# Altium PCB CNC_Remote.PcbDoc
Units mm, origin at the board's own origin, x right, y up, seen from the top; angles counter-clockwise.
Board outline 92.79 x 63.63 mm, 2 copper layers (Top, Bottom), stack 1.57 mm thick; 35 components, 19 nets, 136 pads, 14 vias.
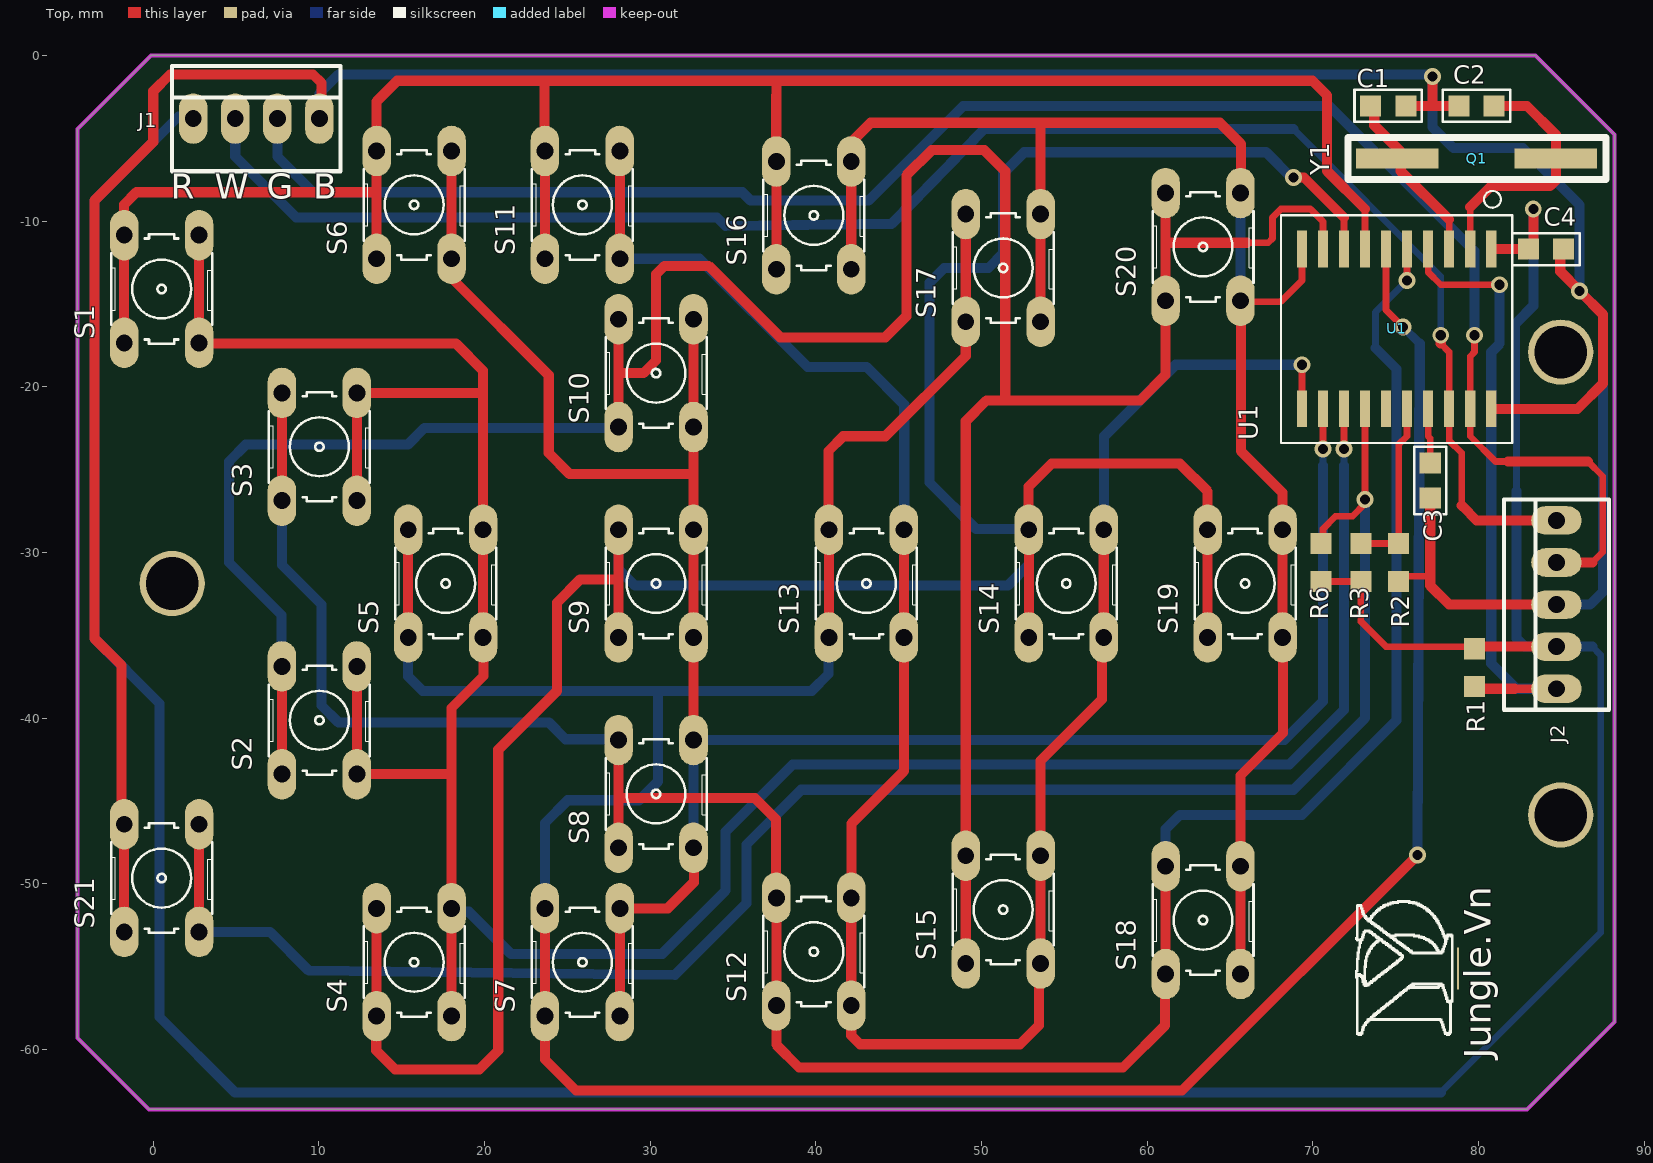
[diagram p0: Top view]
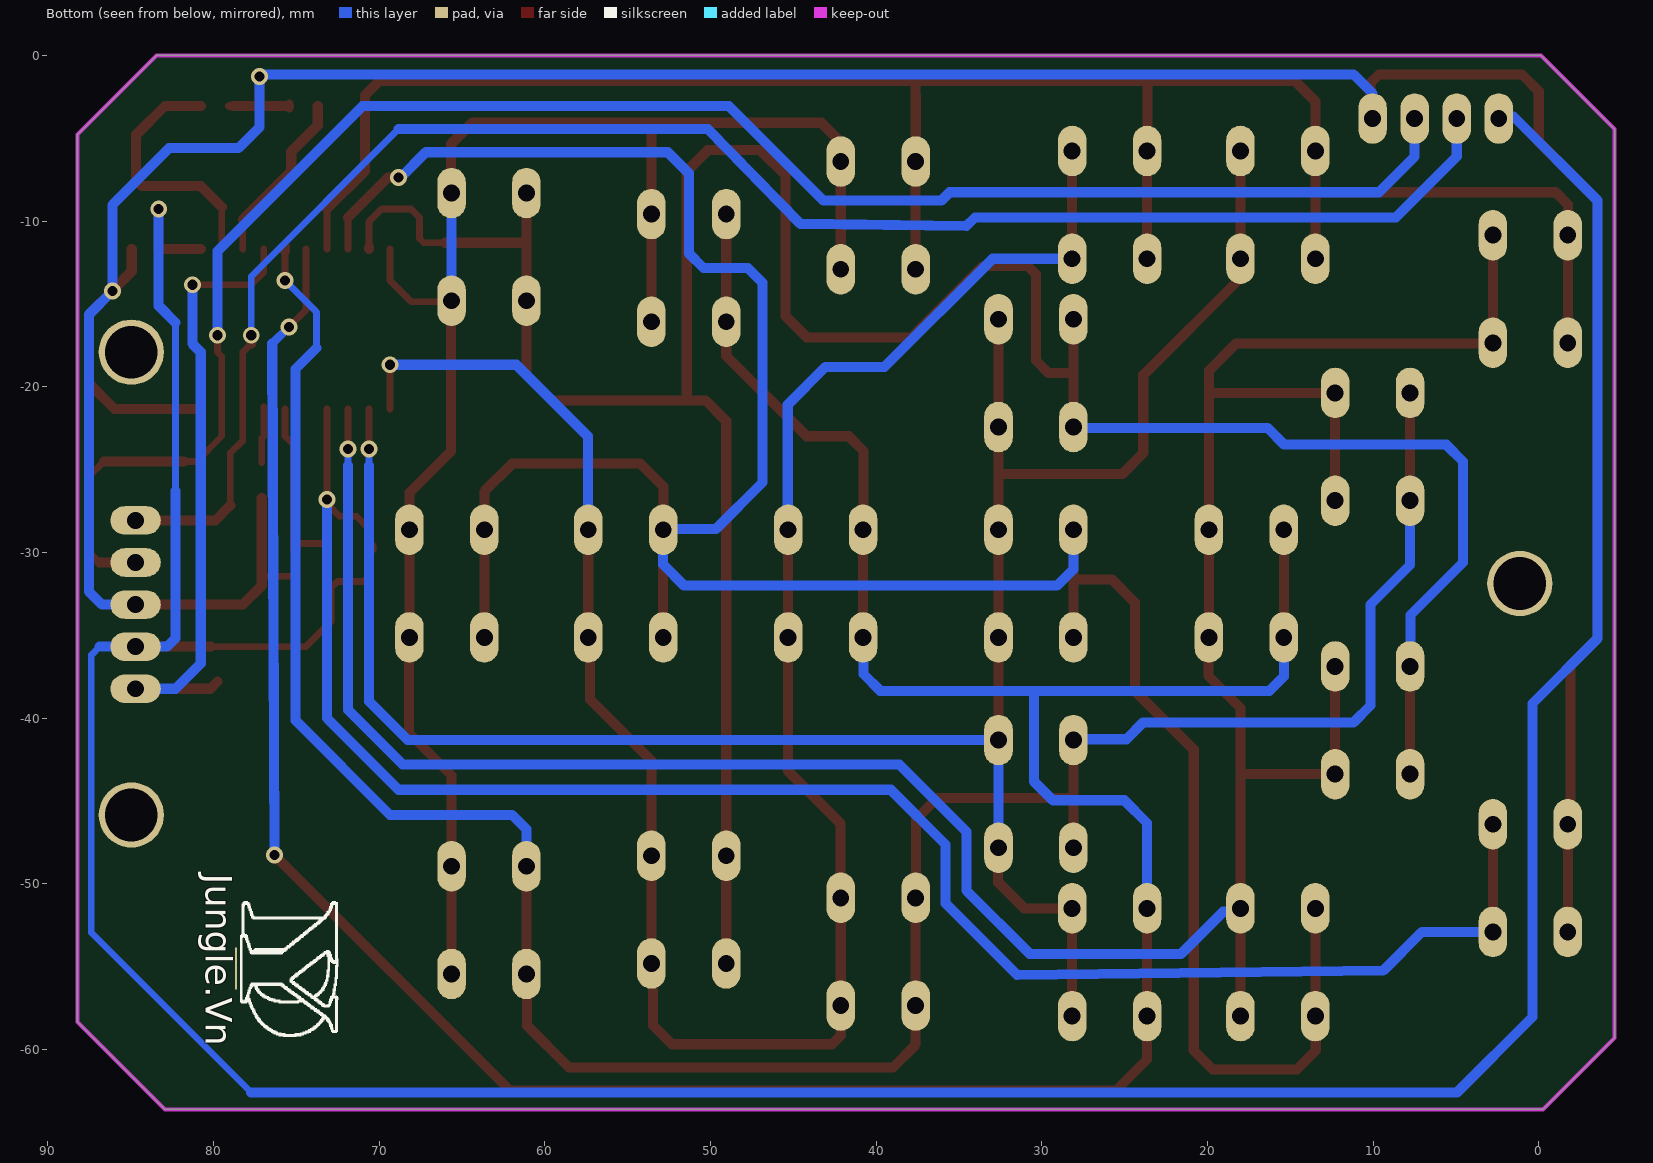
[diagram p1: Bottom view, seen from below]

## Layer stack, top to bottom
Top Solder: solder mask 0.0102, Solder Resist, Dk 3.5
Top: signal copper 0.035
Dielectric 1: core 1.5, FR-4, Dk 4.8
Bottom: signal copper 0.035
Bottom Solder: solder mask 0.0102, Solder Resist, Dk 3.5

## Board outline
-0.254,-63.627 -4.572,-59.309 -4.572,-4.445 -0.127,0 83.439,0 88.214,-4.775 88.214,-58.344 82.931,-63.627

## Design rules (kind name [scope] priority, off if disabled: settings)
Clearance mdViaVia [IsVia vs IsVia] p1: gap=0.254
Clearance mdPadVia [IsPad vs IsVia] p2: gap=0.254
Clearance mdPadPad [IsPad vs IsPad] p3: gap=0.254
Clearance mdWireVia [(InLayerClass('Signal Layers') AND IsTrack) vs IsVia] p4: gap=0.254
Clearance mdWirePad [(InLayerClass('Signal Layers') AND IsTrack) vs IsPad] p5: gap=0.254
Clearance mdWireWire [(InLayerClass('Signal Layers') AND IsTrack) vs (InLayerClass('Signal Layers') AND IsTrack)] p6: gap=0.254
Clearance [All] p7: gap=0.254
HoleSize [All] p1: absolutevalues=TRUE maxlimit=2540 minlimit=0.508 maxpercent=80.000 minpercent=20.000
HoleToHoleClearance [All] p1: gap=0.203 allowstackedmicrovias=TRUE
PolygonConnect [All] p1: connectstyle=Relief reliefconductorwidth=0.254 reliefentries=4 polygonreliefangle="90 Angle" airgapwidth=0.254
RoutingVias [All] p1: holewidth=0.711 width=1.27 viastyle="Through Hole" minholewidth=0.711 minwidth=1.27 maxholewidth=0.711 maxwidth=1.27
SilkToSilkClearance [All] p1 off: silktosilkclearance=0.254
SilkToSolderMaskClearance [IsPad] p1 off: minsilkscreentomaskgap=0.254 clearancetoexposedcopper=TRUE
SolderMaskExpansion [All] p1: expansion=0.102
Width [All] p1: maxlimit=2540 minlimit=0.305 preferedwidth=0.254
25 further rules are at their usual default settings.

## Classes and differential pairs
component class CNC_Remote: C1 C2 C3 C4 J1 J2 Q1 R1 R2 R3 R6 S1 S2 S3 S4 S5 S6 S7 S8 S9 S10 S11 S12 S13 S14 S15 S16 S17 S18 S19 S20 S21 U1

## Components (designator, comment, footprint, x,y, rotation, side; value= is the part's Value field where it differs from the comment)
C1 "20pF" C0805 74.549,-3.048 r0 top
C2 "20pF" C0805 79.883,-3.048 r180 top
C3 "0.47uF" C0805 77.089,-25.654 r270 top
C4 "0.1uF" C0805 84.074,-11.684 r0 top
DY_LOGO "DY_LOGO" DY_logo 76.962,-54.991 r270 bottom
DY_LOGO1 "DY_LOGO" DY_logo 77.089,-55.245 r90 top
J1 "USB" 22-23-2041 6.223,-3.81 r0 top
J2 "22-23-2051" 22-23-2051 84.709,-33.147 r90 top
Q1 "12.0Mhz" HC49/US 79.883,-6.223 r0 top
R1 "10K" R0805 79.756,-36.957 r90 top
R2 "0" R0805 75.184,-30.607 r90 top
R3 "0" R0805 72.898,-30.607 r270 top
R6 "10k" R0805 70.485,-30.607 r270 top
S1 "10-XX" B3F-10XX 0.508,-14.097 r90 top
S2 "10-XX" B3F-10XX 10.033,-40.132 r90 top
S3 "10-XX" B3F-10XX 10.033,-23.622 r90 top
S4 "10-XX" B3F-10XX 15.748,-54.737 r90 top
S5 "10-XX" B3F-10XX 17.653,-31.877 r90 top
S6 "10-XX" B3F-10XX 15.748,-9.017 r90 top
S7 "10-XX" B3F-10XX 25.908,-54.737 r90 top
S8 "10-XX" B3F-10XX 30.353,-44.577 r90 top
S9 "10-XX" B3F-10XX 30.353,-31.877 r90 top
S10 "10-XX" B3F-10XX 30.353,-19.177 r90 top
S11 "10-XX" B3F-10XX 25.908,-9.017 r90 top
S12 "10-XX" B3F-10XX 39.878,-54.102 r90 top
S13 "10-XX" B3F-10XX 43.053,-31.877 r90 top
S14 "10-XX" B3F-10XX 55.118,-31.877 r90 top
S15 "10-XX" B3F-10XX 51.308,-51.562 r90 top
S16 "10-XX" B3F-10XX 39.878,-9.652 r90 top
S17 "10-XX" B3F-10XX 51.308,-12.827 r90 top
S18 "10-XX" B3F-10XX 63.373,-52.197 r90 top
S19 "10-XX" B3F-10XX 65.913,-31.877 r90 top
S20 "10-XX" B3F-10XX 63.373,-11.557 r90 top
S21 "10-XX" B3F-10XX 0.508,-49.657 r90 top
U1 "PIC18F1*K50SOIC" SOIC-20 69.342,-11.684 r180 top

## Footprints (in the part's own frame and the unit in brackets; to place one, negate y for a bottom-side part, rotate by r counter-clockwise, add the part's x,y. Pads: shape width x height; smd on the part's side, far side on the other; paste and mask are expansions set on the pad)
22-23-2041 [mil] "22-23-2041"
  oval 67.87x120 hole 40: 1(-150,0) 2(-50,0) 3(50,0) 4(150,0)
  silkscreen extent -200,-125 200,125
22-23-2051 [mil] "22-23-2051"
  oval 67.87x120 hole 40: 1(-200,0) 2(-100,0) 3(0,0) 4(100,0) 5(200,0)
  silkscreen extent -250,-125 250,125
B3F-10XX [mil] "B3F-10XX"
  oval 120x67.87 hole 40: 1(-128,89) 2(128,89) 3(-128,-89) 4(128,-89)
  silkscreen extent -130,-120 130,120
C0805 [mil] "2.0x1.2 mm"
  rect 50x50 smd mask+8: 1(-42,0) 2(42,0)
  silkscreen extent -80,-38 80,38, body extent -39,-25 39,25, height 39
DY_logo [mm]
  rect 2.54x0.127 smd: 1(0.125,-1.675)
  silkscreen extent -3.93,-1.39 4.25,4.5
HC49/US [mm] "HC49/US"
  rect 5x1.219 smd: P$1(4.788,0) P$2(-4.787,0)
  silkscreen extent -7.76,-1.27 7.81,1.27
R0805 [mil] "2.0x1.2 mm"
  rect 50x50 smd mask+8: 1(-45,0) 2(45,0)
  body extent -39,-25 39,25, height 18
SOIC-20 [mil] "SOIC-20"
  rect 24x87 smd: P$1(-450,0) P$2(-400,0) P$3(-350,0) P$4(-300,0) P$5(-250,0) P$6(-200,0) P$7(-150,0) P$8(-100,0) P$9(-50,0) P$10(0,0) P$11(0,380) P$12(-50,380) P$13(-100,380) P$14(-150,380) P$15(-200,380) P$16(-250,380) P$17(-300,380) P$18(-350,380) P$19(-400,380) P$20(-450,380)
  silkscreen extent -500,-138 50,461

## Part data
C1 C2 C3 C4: library part C-EUC0603, "<B>CAPACITOR</B>, European symbol"
J1: library part 22-23-2041, ".100\" (2.54mm) Center Header - 4 Pin"
J2: ".100\" (2.54mm) Center Header - 5 Pin"
Q1: library part CSM-3X
R1 R2 R3 R6: library part R-US_R0603, "<B>RESISTOR</B>, American symbol"
S1 S2 S3 S4 S5 S6 S7 S8 S9 S10 S11 S12 S13 S14 S15 S16 S17 S18 S19 S20 S21: "<b>OMRON SWITCH</b>"

## Free pads (board coordinates)
  round 3.937 hole 3.175: 1(1.143,-31.877) 1(84.963,-45.847) 1(84.963,-17.907)

## Via types
v1: diameter 1.016/1.016 (per signal layer), hole 0.61, Top to Bottom, 14 vias

## Nets (pads, with @x,y where several pads share a name; then routed paths per layer and width w, separated by ;. In a path a pad name is that pad's centre, name@x,y a point inside that pad or via, vN(x,y) a via of type N, cw(c..) or ccw(c..) an arc to the next point about the centre after c; other vN are vias at no path point)
+5V: C4.1 J1.1 J2.2 R1.2 R3.2 R6.2 U1.P$1 | length 222.8
  Top w0.406: R6.2@70.612,-31.445 70.917,-31.75 72.517,-31.75 72.898,-32.131 72.898,-34.163 74.422,-35.687 R1.2@80.162,-35.687
  Top w0.508: C4.1@83.236,-11.684 C4.1@83.312,-11.557
  Top w0.61: R1.2@80.162,-35.687 J2.2 ; U1.P$1 83.236,-11.684 C4.1@83.312,-11.684 ; C4.1@83.312,-11.811 C4.1@83.312,-11.684 ; v1(83.312,-9.271) 83.312,-11.557 C4.1@83.312,-11.684
  Bottom w0.406: 77.724,-62.611 87.376,-52.959 87.376,-36.195 86.868,-35.687 ; 82.296,-26.289 82.296,-16.129
  Bottom w0.61: J1.1 2.286,-3.683 1.524,-3.683 -3.556,-8.763 -3.556,-35.179 0.381,-39.116 0.381,-58.039 4.953,-62.611 77.724,-62.611 ; 82.296,-26.289 82.296,-35.179 82.804,-35.687 J2.2 86.868,-35.687 ; 82.296,-16.129 83.312,-15.113 v1(83.312,-9.271)
COL_0: S1.1 S1.2 S6.1 S6.2 S11.1 S11.2 S16.1 S16.2 U1.P$7 | length 128.2
  Top w0.406: U1.P$7 73.152,-9.271
  Top w0.508: S16.2@37.592,-6.477 S16.2
  Top w0.61: S1.1 S1.2 -1.753,-8.992 -1.016,-8.255 13.487,-8.255 ; S6.2@13.437,-5.715 S6.2 ; S6.1 13.487,-8.255 ; S11.1 S11.2 23.622,-5.74 23.622,-1.651 23.495,-1.524 ; 37.592,-2.413 37.592,-6.477 37.617,-6.502 S16.1 ; S16.2 37.617,-1.549 37.592,-1.524 ; 73.152,-9.271 70.866,-6.985 70.866,-2.413 69.977,-1.524 37.592,-1.524 ; 13.487,-8.255 S6.2 ; S6.2 13.487,-2.769 14.732,-1.524 23.495,-1.524 ; 23.495,-1.524 37.592,-1.524
COL_1: S5.1 S5.2 S7.1 S7.2 S13.1 S13.2 S17.1 S17.2 U1.P$6 | length 192.3
  Top w0.406: U1.P$6 74.422,-15.367 v1(75.438,-16.383)
  Top w0.61: S5.1 S5.2 ; S7.2 S7.1 23.647,-60.604 25.527,-62.484 35.179,-62.484 62.103,-62.484 v1(76.327,-48.26) ; S13.1 S13.2 40.767,-28.6 40.767,-23.876 41.656,-22.987 44.196,-22.987 49.047,-18.136 S17.1 S17.2
  Bottom w0.305: S13.1@40.767,-35.179 40.894,-35.179 S13.1
  Bottom w0.508: v1(75.438,-16.383) 76.454,-17.399
  Bottom w0.61: S5.1 15.392,-37.49 16.256,-38.354 30.48,-38.354 ; S7.2 23.647,-46.33 25.019,-44.958 29.337,-44.958 30.48,-43.815 30.48,-38.354 ; S13.1@40.767,-35.179 40.767,-37.338 39.751,-38.354 30.48,-38.354 ; v1(76.327,-48.26) 76.454,-17.399
COL_2: S3.1 S3.2 S8.1 S8.2 S12.1 S12.2 S18.1 S18.2 U1.P$5 | length 152.7
  Top w0.305: S18.2 61.214,-48.895 S18.2@61.112,-48.895
  Top w0.406: v1(75.692,-13.589) U1.P$5@75.692,-11.811
  Top w0.61: S3.1 S3.2 ; S8.1 28.092,-44.831 ; S8.2 28.092,-44.831 ; S18.2@61.087,-48.768 61.112,-48.793 61.112,-48.895 S18.2 S18.1 61.087,-55.474 61.087,-58.547 58.547,-61.087 38.989,-61.087 37.617,-59.715 S12.1 S12.2 37.592,-50.825 37.592,-46.101 36.322,-44.831 28.092,-44.831 ; U1.P$5@75.692,-11.811 U1.P$5 U1.P$5@75.692,-11.557
  Bottom w0.406: 73.787,-17.653 73.787,-15.494 v1(75.692,-13.589)
  Bottom w0.61: S3.1 7.772,-30.759 10.16,-33.147 10.16,-39.243 11.176,-40.259 23.876,-40.259 24.892,-41.275 28.042,-41.275 S8.2 ; S18.2 61.112,-46.711 61.976,-45.847 69.342,-45.847 75.057,-40.132 75.057,-18.923 73.787,-17.653
COL_3: S4.1 S4.2 S9.1 S9.2 S14.1 S14.2 S19.1 S19.2 U1.P$8 | length 171
  Top w0.406: U1.P$8 71.882,-9.779
  Top w0.508: S4.1@13.462,-58.039 13.716,-58.039 S4.1
  Top w0.61: S4.1@13.462,-57.912 S4.1@13.462,-58.039 ; S4.2 S4.1 13.487,-58.014 S4.1@13.462,-58.039 ; S9.1 28.092,-31.775 27.94,-31.623 ; S9.2 28.092,-31.623 27.94,-31.623 ; S14.1 S14.2 52.832,-28.6 52.832,-26.035 54.229,-24.638 61.976,-24.638 63.652,-26.314 S19.2 S19.1 ; v1(68.834,-7.366) 69.469,-7.366 71.882,-9.779 ; S4.1@13.462,-58.039 13.462,-60.071 14.605,-61.214 19.685,-61.214 20.828,-60.071 20.828,-41.91 24.384,-38.354 24.384,-33.02 25.781,-31.623 27.94,-31.623
  Bottom w0.61: S9.2 28.092,-31.013 29.083,-32.004 51.587,-32.004 52.857,-30.734 S14.2 52.807,-28.575 49.657,-28.575 46.863,-25.781 46.863,-13.716 47.752,-12.827 50.419,-12.827 51.308,-11.938 51.308,-7.112 52.578,-5.842 67.183,-5.842 68.707,-7.366 v1(68.834,-7.366)
COL_4: S2.1 S2.2 S10.1 S10.2 S15.1 S15.2 S20.1 S20.2 U1.P$9 | length 176.1
  Top w0.406: 66.04,-11.303 67.31,-11.303 67.564,-11.049 67.564,-9.779 68.072,-9.271 69.85,-9.271 70.612,-10.033 U1.P$9@70.612,-11.557
  Top w0.61: S2.1 S2.2 ; S10.1 28.092,-19.304 ; S10.2 28.092,-19.304 ; S15.1 S15.2 49.047,-22.073 50.292,-20.828 51.308,-20.828 ; S20.2 61.112,-11.303 ; 66.04,-11.303 61.112,-11.303 ; U1.P$9 U1.P$9@70.612,-11.557 ; 28.092,-19.304 28.219,-19.177 29.591,-19.177 30.353,-18.415 30.353,-13.208 30.861,-12.7 33.528,-12.7 37.846,-17.018 44.196,-17.018 45.466,-15.748 45.466,-7.239 46.99,-5.715 50.165,-5.715 51.435,-6.985 51.435,-20.701 51.308,-20.828 ; 51.308,-20.828 59.563,-20.828 61.112,-19.279 S20.1 61.112,-11.303
  Bottom w0.61: S2.2 7.747,-36.855 7.747,-33.782 4.572,-30.607 4.572,-24.511 5.588,-23.495 15.367,-23.495 16.383,-22.479 28.042,-22.479 S10.1
D+/ICSPDAT: J1.3 J2.4 U1.P$19 | length 109.6
  Top w0.406: v1(79.756,-16.891) 79.756,-17.907 79.502,-18.161 U1.P$19 79.502,-22.987 81.026,-24.511 81.788,-24.511 ; 86.614,-24.511 87.503,-25.4 87.503,-29.972 86.868,-30.607
  Top w0.61: 81.788,-24.511 86.614,-24.511 ; J2.4 86.868,-30.607
  Bottom w0.61: J1.3 7.493,-6.096 9.652,-8.255 35.56,-8.255 36.068,-8.763 43.18,-8.763 48.895,-3.048 70.993,-3.048 79.756,-11.811 v1(79.756,-16.891)
D-/ICSPCLK: J1.2 J2.5 U1.P$18 | length 103.6
  Top w0.305: 78.994,-27.305 79.07,-27.229
  Top w0.406: 77.724,-17.399 78.232,-17.907 U1.P$18 78.232,-23.241 78.994,-24.003 78.994,-27.305
  Top w0.61: 77.724,-17.399 v1(77.724,-16.891) ; 78.994,-27.178 79.07,-27.229 79.883,-28.067 J2.5
  Bottom w0.406: 68.834,-4.445 77.724,-13.335 v1(77.724,-16.891)
  Bottom w0.61: J1.2 4.953,-6.096 8.636,-9.779 34.036,-9.779 34.544,-10.287 44.577,-10.16 50.165,-4.445 68.834,-4.445
GNDA: C1.2 C2.2 C3.2 C4.2 J1.4 J2.3 R2.1 S21.1 S21.2 U1.P$20 | length 214
  Top w0.406: R2.1@75.184,-31.445 76.937,-31.445 77.089,-31.623
  Top w0.508: C1.2@75.413,-3.048 75.438,-2.921 C1.2@75.438,-3.175 ; C2.2 C2.2@79.045,-3.048
  Top w0.61: S21.1 S21.2 -1.905,-46.253 -1.905,-36.83 -3.556,-35.179 -3.556,-8.763 0,-5.207 0,-2.159 1.016,-1.143 9.652,-1.143 10.16,-1.651 10.16,-3.683 J1.4 ; C1.2@75.438,-3.048 77.216,-3.048 ; C3.2 77.089,-31.623 77.089,-32.004 78.232,-33.147 J2.3 J2.3@84.836,-33.147 ; v1(77.216,-1.27) 77.216,-3.048 ; C2.2 77.216,-3.048 ; U1.P$20 85.979,-21.336 87.528,-19.787 87.528,-15.646 v1(86.106,-14.224) 84.938,-13.03 C4.2@84.938,-11.684
  Bottom w0.61: J1.4 10.033,-2.286 11.176,-1.143 77.089,-1.143 v1(77.216,-1.27) 77.216,-4.318 78.486,-5.588 82.677,-5.588 86.106,-9.017 v1(86.106,-14.224) 87.528,-15.646 87.528,-32.36 86.741,-33.147 J2.3
MCLR: J2.1 R1.1 U1.P$4 | length 38.8
  Top w0.406: U1.P$4 76.962,-13.081 77.724,-13.843 v1(81.28,-13.843)
  Top w0.508: 82.169,-38.227 J2.1
  Top w0.61: R1.1@79.756,-37.795 80.188,-38.227 82.169,-38.227
  Bottom w0.61: v1(81.28,-13.843) 81.28,-17.399 80.772,-17.907 80.772,-36.703 82.296,-38.227 J2.1
NetC3_1: C3.1 U1.P$17 | length 3.4
  Top w0.406: U1.P$17@76.962,-21.209 U1.P$17 76.962,-22.987 77.089,-23.114 C3.1
OSC1: C2.1 Q1.P$1 U1.P$2 | length 15.8
  Top w0.406: U1.P$2 79.502,-9.144
  Top w0.61: 79.502,-9.144 80.772,-7.874 84.328,-7.874 84.671,-7.531 Q1.P$1 84.671,-4.788 82.931,-3.048 C2.1 C2.1@80.747,-3.048
OSC2: C1.1 Q1.P$2 U1.P$3 | length 10.5
  Top w0.406: U1.P$3 78.232,-9.906
  Top w0.61: C1.1@73.711,-3.048 73.711,-4.216 75.311,-5.817 75.311,-6.985 78.232,-9.906
ROW_0: S1.3 S1.4 S2.3 S2.4 S3.3 S3.4 S4.3 S4.4 S5.3 S5.4 U1.P$13 | length 172.6
  Top w0.305: S5.3 20.066,-35.179 S5.3@19.939,-35.179
  Top w0.406: v1(71.882,-23.749) U1.P$13
  Top w0.61: S1.4 S1.3 2.819,-17.399 18.288,-17.399 19.914,-19.025 19.914,-20.447 ; S2.4 S2.3 17.831,-43.383 18.009,-43.561 ; S3.3 S3.4 19.837,-20.371 19.914,-20.447 ; S4.3 S4.4 18.009,-43.561 ; S5.3 S5.4 19.914,-20.447 ; S5.3@19.939,-35.154 19.939,-35.179 19.939,-37.465 18.009,-39.395 18.009,-43.561
  Bottom w0.305: S4.4 S4.4@18.034,-51.435
  Bottom w0.406: 71.882,-24.765 v1(71.882,-23.749)
  Bottom w0.61: S4.4@18.034,-51.435 18.034,-51.181 18.542,-51.689 19.05,-51.689 21.59,-54.229 30.734,-54.229 34.544,-50.419 34.544,-46.863 38.608,-42.799 68.58,-42.799 71.882,-39.497 71.882,-24.765
ROW_1: S6.3 S6.4 S7.3 S7.4 S8.3 S8.4 S9.3 S9.4 S10.3 S10.4 U1.P$12 | length 132.2
  Top w0.406: v1(70.612,-23.749) U1.P$12
  Top w0.61: S6.4 S6.3 18.009,-13.437 23.876,-19.304 23.876,-24.003 25.146,-25.273 32.487,-25.273 32.614,-25.4 ; S7.3 S7.4 31.064,-51.486 32.639,-49.911 32.639,-47.854 S8.3 ; S8.4 S9.3 S9.4 32.614,-25.4 ; S10.4 S10.3 32.614,-25.4
  Bottom w0.406: 70.612,-24.765 v1(70.612,-23.749)
  Bottom w0.61: S8.3 S8.4 68.275,-41.326 70.612,-38.989 70.612,-24.765
ROW_2: S11.3 S11.4 S12.3 S12.4 S13.3 S13.4 S14.3 S14.4 S15.3 S15.4 U1.P$11 | length 132.6
  Top w0.406: U1.P$11 v1(69.342,-18.669)
  Top w0.61: S11.3 S11.4 ; S13.4 S13.3 45.314,-43.205 42.164,-46.355 42.164,-50.825 S12.4 S12.3 42.139,-59.157 42.672,-59.69 52.324,-59.69 53.467,-58.547 53.467,-54.915 S15.3 S15.4 53.569,-42.57 57.277,-38.862 57.277,-35.23 S14.3 ; S14.4 S14.3 ; S14.3@57.404,-35.154 S14.3
  Bottom w0.305: S13.4 45.466,-28.575 S13.4@45.339,-28.575
  Bottom w0.508: S14.4 S14.4@57.404,-28.575
  Bottom w0.61: S11.3 32.969,-12.268 39.497,-18.796 43.053,-18.796 45.339,-21.082 45.339,-28.575 S13.4@45.339,-28.6 ; S14.4@57.404,-28.575 57.404,-22.987 61.722,-18.669 v1(69.342,-18.669)
ROW_3: S16.3 S16.4 S17.3 S17.4 S18.3 S18.4 S19.3 S19.4 S20.3 S20.4 U1.P$10 | length 102.8
  Top w0.406: S20.3@65.659,-14.732 65.634,-14.757 S20.3 65.684,-14.859 68.072,-14.859 69.342,-13.589 U1.P$10
  Top w0.61: S16.3 S16.4 42.139,-5.232 43.307,-4.064 53.467,-4.064 ; S17.3 S17.4 53.569,-4.166 53.467,-4.064 ; S18.3 S18.4 65.634,-43.459 68.199,-40.894 68.199,-35.154 S19.3 S19.4 68.174,-26.391 65.659,-23.876 S20.3@65.659,-14.732 ; S20.4 65.659,-8.28 65.659,-5.334 64.389,-4.064 53.467,-4.064
  Bottom w0.61: S20.3 S20.4
ROW_4: R6.1 S21.3 S21.4 U1.P$14 | length 110.2
  Top w0.305: R6.1@70.485,-29.743 70.612,-29.591 R6.1
  Top w0.406: R6.1@70.358,-29.845 70.358,-29.591 R6.1 70.612,-29.337 70.612,-28.575 71.374,-27.813 72.39,-27.813 73.152,-27.051 v1(73.152,-26.797) U1.P$14
  Top w0.61: S21.3 S21.4
  Bottom w0.61: S21.3 7.061,-52.908 9.398,-55.245 31.496,-55.499 35.814,-51.181 35.814,-47.625 39.116,-44.323 68.834,-44.323 73.152,-40.005 v1(73.152,-26.797)
SELECT: R2.2 R3.1 U1.P$16 | length 11.1
  Top w0.305: R2.2@75.184,-29.845 R2.2@75.184,-29.743
  Top w0.406: R3.1@73.152,-29.743 73.431,-29.464 R2.2 ; R2.2@74.93,-29.845 R2.2@75.184,-29.845 ; R2.2@75.184,-29.743 75.184,-23.495 75.692,-22.987 U1.P$16
pads on no net: DY_LOGO1.1 DY_LOGO.1 U1.P$15

## Keep-outs
Keep-Out Layer:
  lines w0.254: -4.572,-59.309 -0.254,-63.627 82.931,-63.627 88.214,-58.344 88.214,-4.775 83.439,0 80.797,0 -0.127,0 -4.572,-4.445 -4.572,-59.309

## Silkscreen, mask and mechanical layers (free items; w line width, h text height)
Top Overlay:
  text "Y1" at 71.374,-7.239 h1.97 r90
  text "R" at 1.073,-9.16 h2.6
  text "W" at 3.7,-9.16 h2.6
  text "G" at 6.842,-9.16 h2.6
  text "B" at 9.663,-9.16 h2.6
  text "U1" at 67.056,-23.241 h1.97 r90
  text "Jungle.Vn" at 81.28,-60.579 h2.76 r90
Bottom Overlay:
  text "Jungle.Vn" at 81.026,-49.403 h2.76 r90

## Text inside footprints (layer, text, board x,y; h text height)
S1: tDocu "1" at -1.143,-18.415 h1.97 r90; tDocu "2" at -1.016,-10.541 h1.97 r90; tDocu "3" at 3.302,-18.669 h1.97 r90; tDocu "4" at 3.302,-10.541 h1.97 r90
S2: tDocu "1" at 8.382,-44.45 h1.97 r90; tDocu "2" at 8.509,-36.576 h1.97 r90; tDocu "3" at 12.827,-44.704 h1.97 r90; tDocu "4" at 12.827,-36.576 h1.97 r90
S3: tDocu "1" at 8.382,-27.94 h1.97 r90; tDocu "2" at 8.509,-20.066 h1.97 r90; tDocu "3" at 12.827,-28.194 h1.97 r90; tDocu "4" at 12.827,-20.066 h1.97 r90
S4: tDocu "1" at 14.097,-59.055 h1.97 r90; tDocu "2" at 14.224,-51.181 h1.97 r90; tDocu "3" at 18.542,-59.309 h1.97 r90; tDocu "4" at 18.542,-51.181 h1.97 r90
S5: tDocu "1" at 16.002,-36.195 h1.97 r90; tDocu "2" at 16.129,-28.321 h1.97 r90; tDocu "3" at 20.447,-36.449 h1.97 r90; tDocu "4" at 20.447,-28.321 h1.97 r90
S6: tDocu "1" at 14.097,-13.335 h1.97 r90; tDocu "2" at 14.224,-5.461 h1.97 r90; tDocu "3" at 18.542,-13.589 h1.97 r90; tDocu "4" at 18.542,-5.461 h1.97 r90
S7: tDocu "1" at 24.257,-59.055 h1.97 r90; tDocu "2" at 24.384,-51.181 h1.97 r90; tDocu "3" at 28.702,-59.309 h1.97 r90; tDocu "4" at 28.702,-51.181 h1.97 r90
S8: tDocu "1" at 28.702,-48.895 h1.97 r90; tDocu "2" at 28.829,-41.021 h1.97 r90; tDocu "3" at 33.147,-49.149 h1.97 r90; tDocu "4" at 33.147,-41.021 h1.97 r90
S9: tDocu "1" at 28.702,-36.195 h1.97 r90; tDocu "2" at 28.829,-28.321 h1.97 r90; tDocu "3" at 33.147,-36.449 h1.97 r90; tDocu "4" at 33.147,-28.321 h1.97 r90
S10: tDocu "1" at 28.702,-23.495 h1.97 r90; tDocu "2" at 28.829,-15.621 h1.97 r90; tDocu "3" at 33.147,-23.749 h1.97 r90; tDocu "4" at 33.147,-15.621 h1.97 r90
S11: tDocu "1" at 24.257,-13.335 h1.97 r90; tDocu "2" at 24.384,-5.461 h1.97 r90; tDocu "3" at 28.702,-13.589 h1.97 r90; tDocu "4" at 28.702,-5.461 h1.97 r90
S12: tDocu "1" at 38.227,-58.42 h1.97 r90; tDocu "2" at 38.354,-50.546 h1.97 r90; tDocu "3" at 42.672,-58.674 h1.97 r90; tDocu "4" at 42.672,-50.546 h1.97 r90
S13: tDocu "1" at 41.402,-36.195 h1.97 r90; tDocu "2" at 41.529,-28.321 h1.97 r90; tDocu "3" at 45.847,-36.449 h1.97 r90; tDocu "4" at 45.847,-28.321 h1.97 r90
S14: tDocu "1" at 53.467,-36.195 h1.97 r90; tDocu "2" at 53.594,-28.321 h1.97 r90; tDocu "3" at 57.912,-36.449 h1.97 r90; tDocu "4" at 57.912,-28.321 h1.97 r90
S15: tDocu "1" at 49.657,-55.88 h1.97 r90; tDocu "2" at 49.784,-48.006 h1.97 r90; tDocu "3" at 54.102,-56.134 h1.97 r90; tDocu "4" at 54.102,-48.006 h1.97 r90
S16: tDocu "1" at 38.227,-13.97 h1.97 r90; tDocu "2" at 38.354,-6.096 h1.97 r90; tDocu "3" at 42.672,-14.224 h1.97 r90; tDocu "4" at 42.672,-6.096 h1.97 r90
S17: tDocu "1" at 49.657,-17.145 h1.97 r90; tDocu "2" at 49.784,-9.271 h1.97 r90; tDocu "3" at 54.102,-17.399 h1.97 r90; tDocu "4" at 54.102,-9.271 h1.97 r90
S18: tDocu "1" at 61.722,-56.515 h1.97 r90; tDocu "2" at 61.849,-48.641 h1.97 r90; tDocu "3" at 66.167,-56.769 h1.97 r90; tDocu "4" at 66.167,-48.641 h1.97 r90
S19: tDocu "1" at 64.262,-36.195 h1.97 r90; tDocu "2" at 64.389,-28.321 h1.97 r90; tDocu "3" at 68.707,-36.449 h1.97 r90; tDocu "4" at 68.707,-28.321 h1.97 r90
S20: tDocu "1" at 61.722,-15.875 h1.97 r90; tDocu "2" at 61.849,-8.001 h1.97 r90; tDocu "3" at 66.167,-16.129 h1.97 r90; tDocu "4" at 66.167,-8.001 h1.97 r90
S21: tDocu "1" at -1.143,-53.975 h1.97 r90; tDocu "2" at -1.016,-46.101 h1.97 r90; tDocu "3" at 3.302,-54.229 h1.97 r90; tDocu "4" at 3.302,-46.101 h1.97 r90